# EAGLE board microSD_Breakout (EAGLE 6.1)
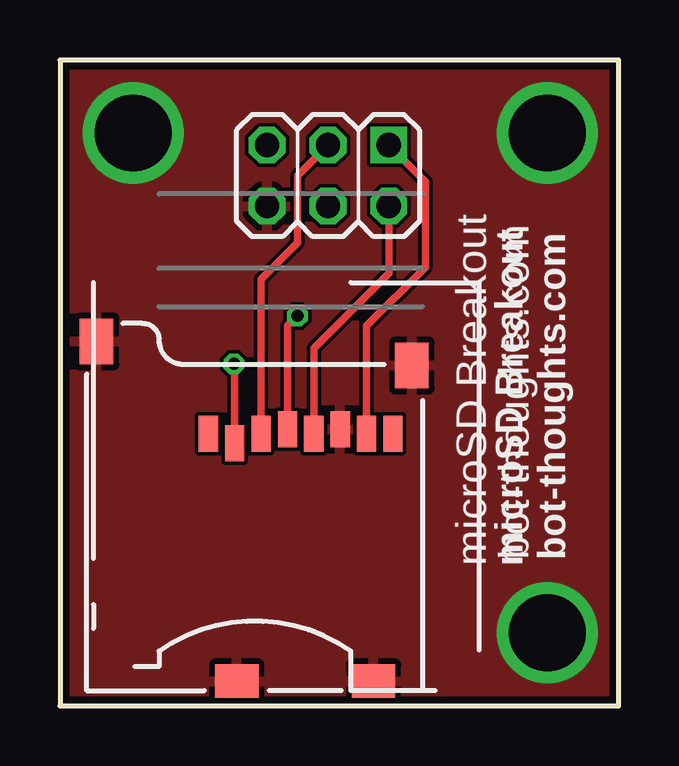
[diagram p0: board, top side]
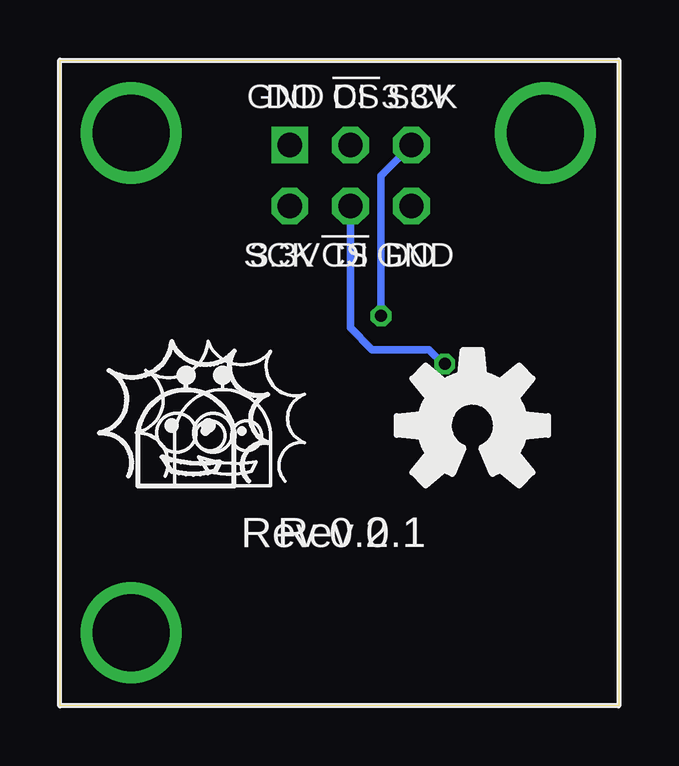
[diagram p1: board, bottom side, seen from below]

Size 23.29 x 26.91 mm. Coordinates in mm from the lower left corner, seen from the top.
Outline: 0,0 23.29,0 23.29,26.91 0,26.91 0,0
Copper layers (1*16): Top 0.0356mm / dielectric 1.5011mm / Bottom 0.0356mm
Design rules: minimum track width 6mil, minimum drill 13mil, track to track 6mil, track to pad 6mil, pad to pad 6mil, via to via 6mil, smd to smd 6mil, copper to edge 15mil, drill to drill 6mil, minimum pad ring 7mil, minimum via ring 7mil, stop-mask expansion 4mil, vias tented up to drill 0mil, thermal gap 10mil

## Footprints (pad centres in the part's own frame; a part is rotated, then mirrored left to right if it is on the bottom)
2X03 = drill 1.016 square: 1 -2.54,-1.27 | drill 1.016 octagon: 2 -2.54,1.27; 3 0,-1.27; 4 0,1.27; 5 2.54,-1.27; 6 2.54,1.27
MICRO-SD-SOCKET-PP = smd 0.8 x 1.5: 1 -8.94,10.7; 2 -7.84,10.3; 3 -6.74,10.7; 4 -5.64,10.9; 5 -4.54,10.7; 6 -3.44,10.9; 7 -2.34,10.7; 8 -1.24,10.7 | smd 1.8 x 1.4: CD1 -2.05,0.4; CD2 -7.75,0.4 | smd 1.4 x 1.9: GND1 -13.6,14.55; GND3 -0.45,13.55

## Placement (x,y rotation side)
JP1  [2X03]  11.18,22.1 180 top
U1  USD-SOCKETNEW  [MICRO-SD-SOCKET-PP]  15.12,0.64 0 top

## Library data of the parts
JP1 = pinhead-2
U1 = SparkFun

## Nets
!CS: JP1.4 U1.2
DI: JP1.3 U1.3
DO: JP1.1 U1.7
GND: JP1.6 U1.6 U1.CD1 U1.CD2 U1.GND1 U1.GND3
SCK: JP1.2 U1.5
VCC: JP1.5 U1.4

## Tracks (layer width: path | path; a pad name or v marks a point on that pad's centre or on a via)
!CS  (via drill 0.5)
  Top 0.305: U1.2 7.28,14.22 v7.25,14.25
  Bottom 0.305: v7.25,14.25 7.3,14.25 7.9,14.85 10.28,14.85 11.18,15.75 JP1.4
DI
  Top 0.305: U1.3 8.38,17.78 9.91,19.3 9.91,22.1 JP1.3
DO
  Top 0.305: U1.7 12.78,15.83 15.24,18.29 15.24,21.84 JP1.1
GND  (via drill 3.2)
  other vias: 3.05,23.88 20.32,23.88 20.32,3.05
  pour Top: 0,0 0,26.92 23.11,26.92 23.11,0
SCK
  Top 0.305: U1.5 10.58,14.9 13.72,18.03 JP1.2
VCC  (via drill 0.5)
  Top 0.305: U1.4 9.48,15.83 v9.91,16.26
  Bottom 0.305: v9.91,16.26 9.91,22.1 JP1.5

## Text on the board
bPlace: Rev 0.1
tNames: microSD Breakout | bot-thoughts.com
bNames: SCK | !CS | GND | DO | DI | 3.3V
_tsilk: microSD Breakout | bot-thoughts.com
_bsilk: 3.3V | DI | DO | GND | !CS | SCK | Rev 0.2